# EAGLE board GyroDrive (EAGLE 7.4.0)
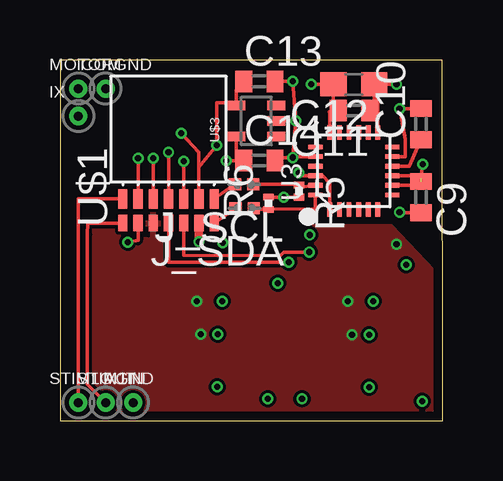
[diagram p0: board, top side]
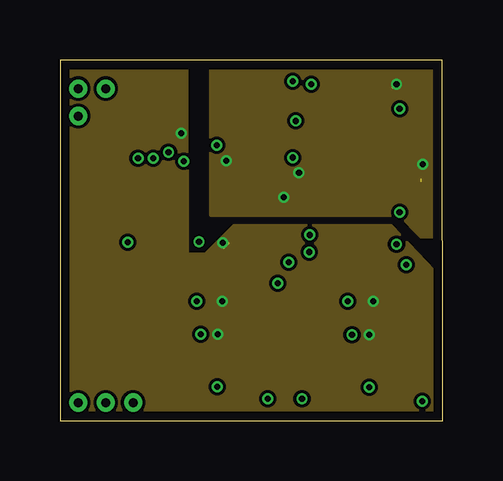
[diagram p1: board, inner layer Route2]
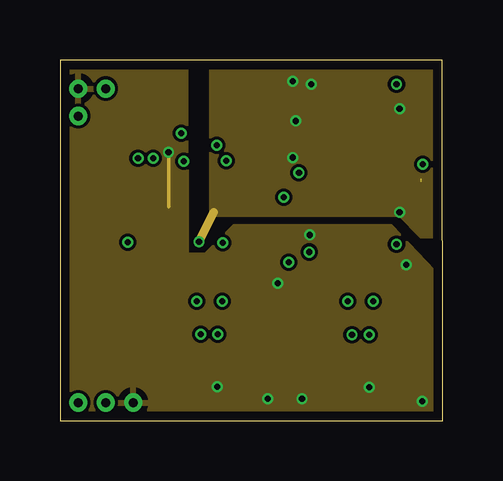
[diagram p2: board, inner layer Route15]
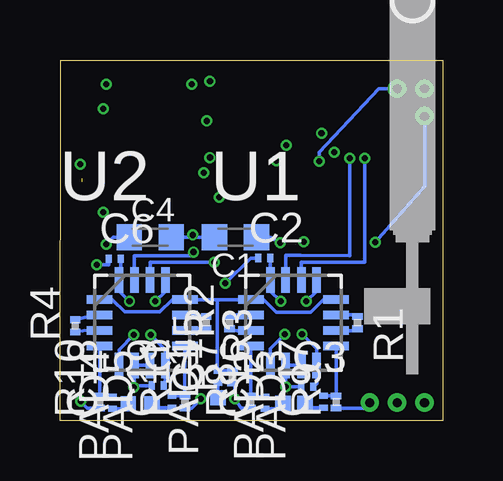
[diagram p3: board, bottom side, seen from below]

Size 15.95 x 15.04 mm. Coordinates in mm from the lower left corner, seen from the top.
Outline: 0,0 15.95,0 15.93,15.04 0,15.04 0,0
Copper layers (1*2*15*16): Top 0.035559375mm / dielectric 0.17018125mm / Route2 0.01778125mm / dielectric 47mil / Route15 0.01778125mm / dielectric 0.17018125mm / Bottom 0.035559375mm
Design rules "OSHPark-4layer": minimum track width 5mil, minimum drill 10mil, track to track 5mil, track to pad 5mil, pad to pad 5mil, via to via 5mil, smd to smd 5mil, copper to edge 15mil, drill to drill 6mil, minimum pad ring 4mil, minimum via ring 4mil, stop-mask expansion 2.5mil, vias tented up to drill 0mil, thermal gap 10mil

## Footprints (pad centres in the part's own frame; a part is rotated, then mirrored left to right if it is on the bottom)
30MIL/15MIL = drill 0.381 pad 0.762: P$1 0,0
C0603K = smd 1.05 x 1.08: 1 -0.875,0; 2 0.875,0
C0201 = smd 0.25 x 0.35: 1 -0.25,0; 2 0.25,0
C0402 = smd 0.7 x 0.9: 1 -0.65,0; 2 0.65,0
C0603 = smd 1.1 x 1: 1 -0.85,0; 2 0.85,0
SJ = smd 0.508 x 0.508: 1 -0.381,0; 2 0.381,0
SMD25-25-MIL = smd 0.635 x 0.635: 1 0,0
R0201 = smd 0.28 x 0.43: 1 -0.255,0; 2 0.255,0
QFN65P400X400X100-16N = smd 1.067 x 0.356: 1 -1.778,0.965; 2 -1.778,0.33; 3 -1.778,-0.33; 4 -1.778,-0.965; 9 1.778,-0.965; 10 1.778,-0.33; 11 1.778,0.33; 12 1.778,0.965 | smd 0.356 x 1.067: 5 -0.965,-1.778; 6 -0.33,-1.778; 7 0.33,-1.778; 8 0.965,-1.778; 13 0.965,1.778; 14 0.33,1.778; 15 -0.33,1.778; 16 -0.965,1.778
LEAD-QFN24 = smd 0.6 x 0.2: 1 -1.6,1; 2 -1.6,0.6; 3 -1.6,0.2; 4 -1.6,-0.2; 5 -1.6,-0.6; 6 -1.6,-1; 13 1.6,-1; 14 1.6,-0.6; 15 1.6,-0.2; 16 1.6,0.2; 17 1.6,0.6; 18 1.6,1 | smd 0.2 x 0.6: 7 -1,-1.6; 8 -0.6,-1.6; 9 -0.2,-1.6; 10 0.2,-1.6; 11 0.6,-1.6; 12 1,-1.6; 19 1,1.6; 20 0.6,1.6; 21 0.2,1.6; 22 -0.2,1.6; 23 -0.6,1.6; 24 -1,1.6
OMN-A75243-001 = smd 0.381 x 0.686: A -1.905,-0.47; B 0.635,-0.47; D 1.27,-0.47; F -0.635,-0.47; J 0,-0.47; P 1.905,-0.47; V -1.27,-0.47 | smd 0.381 x 0.813: E -1.905,0.533; K 1.905,0.533; L 0,0.533; N -1.27,0.533; R -0.635,0.533; T 0.635,0.533; U 1.27,0.533
SC70 = smd 0.4 x 0.75: 1 -0.65,-0.825; 2 0,-0.825; 3 0.65,-0.825; 4 0.65,0.825; 5 -0.65,0.825

## Placement (x,y rotation side)
AGND  [30MIL/15MIL]  3.05,0.76 0 top
C1  [C0603K]  8.64,7.65 180 bottom
C2  [C0201]  7.44,6.78 0 bottom
C3  [C0201]  5.64,1.42 0 bottom
C4  [C0603K]  12.19,7.65 0 bottom
C6  [C0201]  13.67,6.76 0 bottom
C7  [C0201]  11.89,1.47 0 bottom
C9  10nF  [C0402]  15.04,9.32 270 top
C10  0.1uF  [C0402]  15.04,12.37 90 top
C11  0.1uF  [C0402]  12.24,12.93 180 top
C12  [C0603]  12.24,14.02 180 top
C13  [C0402]  8.31,14.15 0 top
C14  [C0402]  8.31,10.85 0 top
C15  47pF  [C0201]  9.37,1.83 90 bottom
C16  [C0201]  7.42,0.76 90 bottom
C17  [C0201]  4.98,0.79 90 bottom
C18  [C0201]  13.77,0.76 90 bottom
C19  [C0201]  11.28,0.79 90 bottom
ICOM  [30MIL/15MIL]  1.91,13.84 0 top
IX  [30MIL/15MIL]  0.76,12.7 0 top
J_SCL  [SJ]  7.67,9.86 180 top
J_SDA  [SJ]  7.7,8.86 180 top
MOTORGND  [30MIL/15MIL]  0.76,13.84 0 top
PAD1  [SMD25-25-MIL]  9.37,0.97 0 bottom
PAD2  [SMD25-25-MIL]  6.65,0.74 0 bottom
PAD3  [SMD25-25-MIL]  5.74,0.74 0 bottom
PAD4  [SMD25-25-MIL]  13.11,0.71 0 bottom
PAD5  [SMD25-25-MIL]  12.12,0.71 0 bottom
R1  [R0201]  3.56,4.09 270 bottom
R2  [R0201]  8.89,4.09 90 bottom
R3  [R0201]  9.86,4.09 270 bottom
R4  [R0201]  15.32,3.96 90 bottom
R5  10k  [R0201]  9.96,9.58 270 top
R6  10k  [R0201]  8.69,9.07 90 top
R7  1.5M  [R0201]  8.76,1.83 90 bottom
R8  1.5M  [R0201]  8,0.79 90 bottom
R9  1.5M  [R0201]  4.45,0.79 90 bottom
R10  1.5M  [R0201]  14.3,0.79 90 bottom
R11  1.5M  [R0201]  10.74,0.79 90 bottom
STIM1IN  [30MIL/15MIL]  1.91,0.76 0 top
STIM1OUT  [30MIL/15MIL]  0.76,0.76 0 top
U1  AD8426ACPZ-R7  [QFN65P400X400X100-16N]  6.22,4.09 0 bottom
U2  AD8426ACPZ-R7  [QFN65P400X400X100-16N]  12.52,4.09 0 bottom
U3  [LEAD-QFN24]  12.24,10.41 90 top
U$1  OMN-A75243-001  [OMN-A75243-001]  4.52,8.71 0 top
U$2  MICRODRIVE-MOTOR  [0206A001B-021-47:1-Y2825]  1.27,17.53 180 bottom
U$3  2.5V  [SC70]  8.18,12.5 90 top

## Library data of the parts
AGND ICOM IX J_SCL J_SDA MOTORGND PAD1-PAD5 STIM1IN STIM1OUT U$2 U$3 = michael-stetner
C1-C4 C6 C7 C9-C19 R1-R11 = resistor
U1 U2 = analog-devices-e14; MPN: AD8426ACPZ-R7; OC_FARNELL: 1971714; OC_NEWARK: 58T4523; PACKAGE: LFCSP-16; SUPPLIER: Analog Devices
U3 = Grove - IMU 10DOF v1.1
U$1 = GFL

## Nets
+VS: C1.1 C2.2 C6.2 C13.1 U1.5 U1.16 U2.5 U2.16 U$1.U U$3.4
-VS: C3.2 C4.1 C7.2 U1.8 U1.13 U2.8 U2.13 U$1.F
AGND: AGND.P$1 C1.2 C2.1 C3.1 C4.2 C6.1 C7.1 MOTORGND.P$1 R7.1 R8.1 R9.1 R10.1 R11.1 U1.6 U1.7 U2.6 U2.7 U$1.L
DGND: C9.2 C10.2 C11.2 C12.2 C13.2 C14.2 U3.11 U3.18 U3.20 U$1.D U$3.2
E1_FILT: C16.2 R8.2 U1.4
E2_FILT: C17.2 R9.2 U1.9
E3_FILT: C18.2 R10.2 U2.4
E4_FILT: C19.2 R11.2 U2.9
N$1: R1.2 U1.10
N$2: R1.1 U1.11
N$3: R2.1 U1.3
N$4: R2.2 U1.2
N$5: C15.1 PAD1.1
N$6: C16.1 PAD2.1
N$7: C10.1 U3.10
N$8: R3.2 U2.10
N$9: R3.1 U2.11
N$10: R4.1 U2.3
N$11: R4.2 U2.2
N$12: C17.1 PAD3.1
N$13: C18.1 PAD4.1
N$14: IX.P$1 U$1.V
N$15: STIM1IN.P$1 U$1.A
N$16: STIM1OUT.P$1 U$1.E
N$17: ICOM.P$1 U$1.T
N$18: C19.1 PAD5.1
S1: U1.15 U$1.R
S2: U1.14 U$1.N
S3: U2.15 U$1.B
S4: U2.14 U$1.J
SCL: J_SCL.1 R5.1 U3.23
SCLOUT: J_SCL.2 U$1.K
SDA: J_SDA.1 R6.1 U3.24
SDAOUT: J_SDA.2 U$1.P
VDD: C9.1 C11.1 C12.1 C14.1 R5.2 R6.2 U3.1 U3.8 U3.9 U3.13 U3.22 U$3.5
VGND_FILT: C15.2 R7.2 U1.1 U1.12 U2.1 U2.12

## Tracks (layer width: path | path; a pad name or v marks a point on that pad's centre or on a via)
+VS  (via drill 0.25)
  Top 0.152: C13.1 7.35,13.77 U$3.4 7.35,13.26 6.53,13.26 v6.53,11.48 5.79,10.57 U$1.U 5.79,11.2 v5.05,11.99
  Route2 0.152: v6.78,7.42 6.99,7.39 6.83,7.24
  Bottom 0.152: v13.06,4.98 13.49,5.41 U2.16 13.41,5.94 C6.2 | v6.76,4.98 7.19,5.41 U1.16 C2.2 | U1.5 7.19,3 v6.58,3.61 | U2.5 13.49,2.97 v12.88,3.58 | C1.1 7.19,7.64 v6.78,7.42
  pour Route2: 0,0 15.95,0 15.95,5.87 13.79,8.13 7.24,8.13 6.05,6.93 5.31,6.93 5.28,15.04 0,15.04
-VS  (via drill 0.25)
  Top 0.152: v14.02,7.37 14.15,7.24
  Bottom 0.152: U2.13 11.56,5.38 v11.99,4.98 | C7.2 11.56,1.55 U2.8 11.56,2.97 v12.17,3.58 | v5.69,4.98 5.26,5.41 U1.13 | v5.87,3.61 5.26,3 U1.8 5.26,1.55 C3.2 | C4.1 13.74,7.64 v14.02,7.37
  pour Top: 0,0 15.95,0 15.95,5.87 13.79,8.13 7.24,8.13 6.05,6.93 5.31,6.93 5.28,15.04 0,15.04
AGND  (via drill 0.25)
  Top 0.152: U$1.L v4.52,11.2
  Route15 0.152: v4.52,11.2 4.52,8.91 | v14.43,6.5 14.3,6.38 | v10.41,7.75 10.46,7.7
  Bottom 0.152: C6.1 13.91,6.5 v14.43,6.5 | R7.1 8.66,1.57 v8.66,0.91 8.41,0.53 R8.1 | U1.7 U1.6 v6.55,1.42 C3.1 | U2.7 U2.6 12.85,1.4 v12.88,1.4 12.88,1.47 C7.1 | R11.1 10.47,0.53 v10.08,0.91 | R10.1 14.81,0.53 v15.09,0.81 | R9.1 3.28,0.53 AGND.P$1 | C2.1 8,6.78 v9.07,5.74 | C1.2 10.29,7.64 v10.41,7.75 10.54,7.64 C4.2
  pour Route15: 0,0 15.95,0 15.95,5.87 13.79,8.13 7.24,8.13 6.05,6.93 5.31,6.93 5.28,15.04 0,15.04
DGND  (via drill 0.25)
  Top 0.152: 11.39,12.88 C11.2 11.24,12.88 U3.18 | C14.2 8.83,10.97 v9.7,10.97 | v9.83,12.5 v9.7,14.15 C13.2 | U$3.2 v9.83,12.5 | v9.7,10.97 v9.83,12.5 | C10.2 15.04,13.01 v14.15,13.01 14.38,11.73 14.38,11.01 U3.11 | C9.2 14.28,8.67 v14.15,8.69 | v10.46,14.02 C12.2 11.39,12.88 | 11.23,12.88 11.39,12.88 | U3.20 9.7,11.01 v9.7,10.97
  Top 0.356: U$1.D v5.79,7.47
  Route15 0.152: v14.15,8.69 14.15,8.81
  Route15 0.356: v5.79,7.47 6.4,8.69
  pour Route15: 15.93,15.04 15.93,7.67 15.04,7.67 14.15,8.56 6.27,8.56 6.27,15.04
E1_FILT
  Bottom 0.152: U1.4 R8.2 8,1.01 C16.2
E2_FILT
  Bottom 0.152: U1.9 R9.2 C17.2
E3_FILT
  Bottom 0.152: C18.2 13.87,1.04 R10.2 U2.4
E4_FILT
  Bottom 0.152: U2.9 R11.2 C19.2
N$1
  Bottom 0.152: U1.10 3.56,3.76 R1.2
N$2
  Bottom 0.152: U1.11 3.56,4.42 R1.1
N$3
  Bottom 0.152: U1.3 8.59,3.76 R2.1
N$4
  Bottom 0.152: U1.2 8.59,4.42 R2.2
N$5
  Bottom 0.152: PAD1.1 C15.1
N$6
  Bottom 0.152: C16.1 6.88,0.51 PAD2.1
N$7
  Top 0.152: U3.10 14.55,10.61 C10.1
N$8
  Bottom 0.152: U2.10 10.74,3.83 R3.2
N$9
  Bottom 0.152: U2.11 10.74,4.47 R3.1
N$10
  Bottom 0.152: U2.3 14.3,3.83 R4.1
N$11
  Bottom 0.152: U2.2 14.3,4.47 R4.2
N$12
  Bottom 0.152: C17.1 5.54,0.54 PAD3.1
N$13
  Bottom 0.152: C18.1 13.31,0.51 PAD4.1
N$14  (via drill 0.25)
  Top 0.152: U$1.V 3.25,7.52 v2.82,7.44
  Bottom 0.152: v2.82,7.44 0.76,9.78 IX.P$1
N$15
  Top 0.152: STIM1IN.P$1 1.14,1.52 1.14,7.77 1.16,8.24 U$1.A
N$16
  Top 0.152: STIM1OUT.P$1 0.76,9.25 U$1.E
N$17  (via drill 0.25)
  Top 0.152: v5.16,10.82 U$1.T
  Bottom 0.152: ICOM.P$1 2.67,13.84 5.16,11.2 v5.16,10.82
N$18
  Bottom 0.152: C19.1 11.94,0.54 PAD5.1
S1  (via drill 0.25)
  Top 0.152: v3.89,10.95 U$1.R
  Bottom 0.152: U1.15 6.55,6.91 5.94,6.91 3.89,6.88 v3.89,10.95
S2  (via drill 0.25)
  Top 0.152: v3.25,10.95 U$1.N
  Bottom 0.152: U1.14 5.89,6.6 3.25,6.6 v3.25,10.95
S3  (via drill 0.25)
  Top 0.152: 5.16,8.03 U$1.B 5.16,6.91 9.17,6.88 9.32,7.04 v10.39,7.04
  Bottom 0.152: U2.15 12.85,6.88 10.39,6.88 v10.39,7.04
S4  (via drill 0.25)
  Top 0.152: U$1.J 4.52,6.6 v9.53,6.6
  Bottom 0.152: U2.14 12.19,6.6 v9.53,6.6
SCL
  Top 0.152: U3.23 9.96,9.74 R5.1 9.58,9.86 J_SCL.1
SCLOUT
  Top 0.152: J_SCL.2 U$1.K
SDA
  Top 0.152: U3.24 10.64,8.83 R6.1 8.08,8.81 J_SDA.1
SDAOUT
  Top 0.152: J_SDA.2 U$1.P
VDD  (via drill 0.25)  (1 unrouted)
  Top 0.152: C12.1 13.09,12.88 C11.1 13.24,12.88 U3.13 13.24,14.02 v14.02,14.02 | U3.8 15.04,9.81 C9.1 15.04,10.21 U3.9 | U3.1 11.24,9.91 11.23,9.93 10.94,10.21 U3.22 10.08,10.21 10.08,10.34 v9.96,10.34 | C14.1 7.35,10.97 U$3.5 7.35,10.85 | R6.2 8.81,9.32 R5.2 9.7,9.32 v9.32,9.32 | 7.35,10.85 7.42,10.85 | 7.35,10.85 v6.93,10.85 | 15.04,10.08 v15.11,10.69
  Route2 0.152: v9.32,9.32 9.32,9.45 | v14.02,14.02 13.89,13.89 | v9.96,10.34 9.96,10.46 9.83,10.46
  pour Route2: 15.93,15.04 6.27,15.04 6.27,8.56 14.15,8.56 15.04,7.67 15.93,7.67
VGND_FILT
  Bottom 0.152: 9.4,5.05 U1.1 7.47,5.05 6.93,4.52 5.51,4.52 4.98,5.05 U1.12 | 9.4,5.05 U2.12 11.28,5.05 11.79,4.55 13.26,4.55 13.77,5.05 U2.1 | C15.2 8.82,2.08 R7.2 9.4,2.08 9.4,5.05